# Altium PCB AdapterBoard.PcbDoc
Units mm, origin at the board's own origin, x right, y up, seen from the top; angles counter-clockwise.
Board outline 89.3 x 93 mm, 2 copper layers (Top Layer, Bottom Layer); 3 components, 104 nets, 204 pads, 94 vias.
Unrouted connection lines stored in the file: 8.
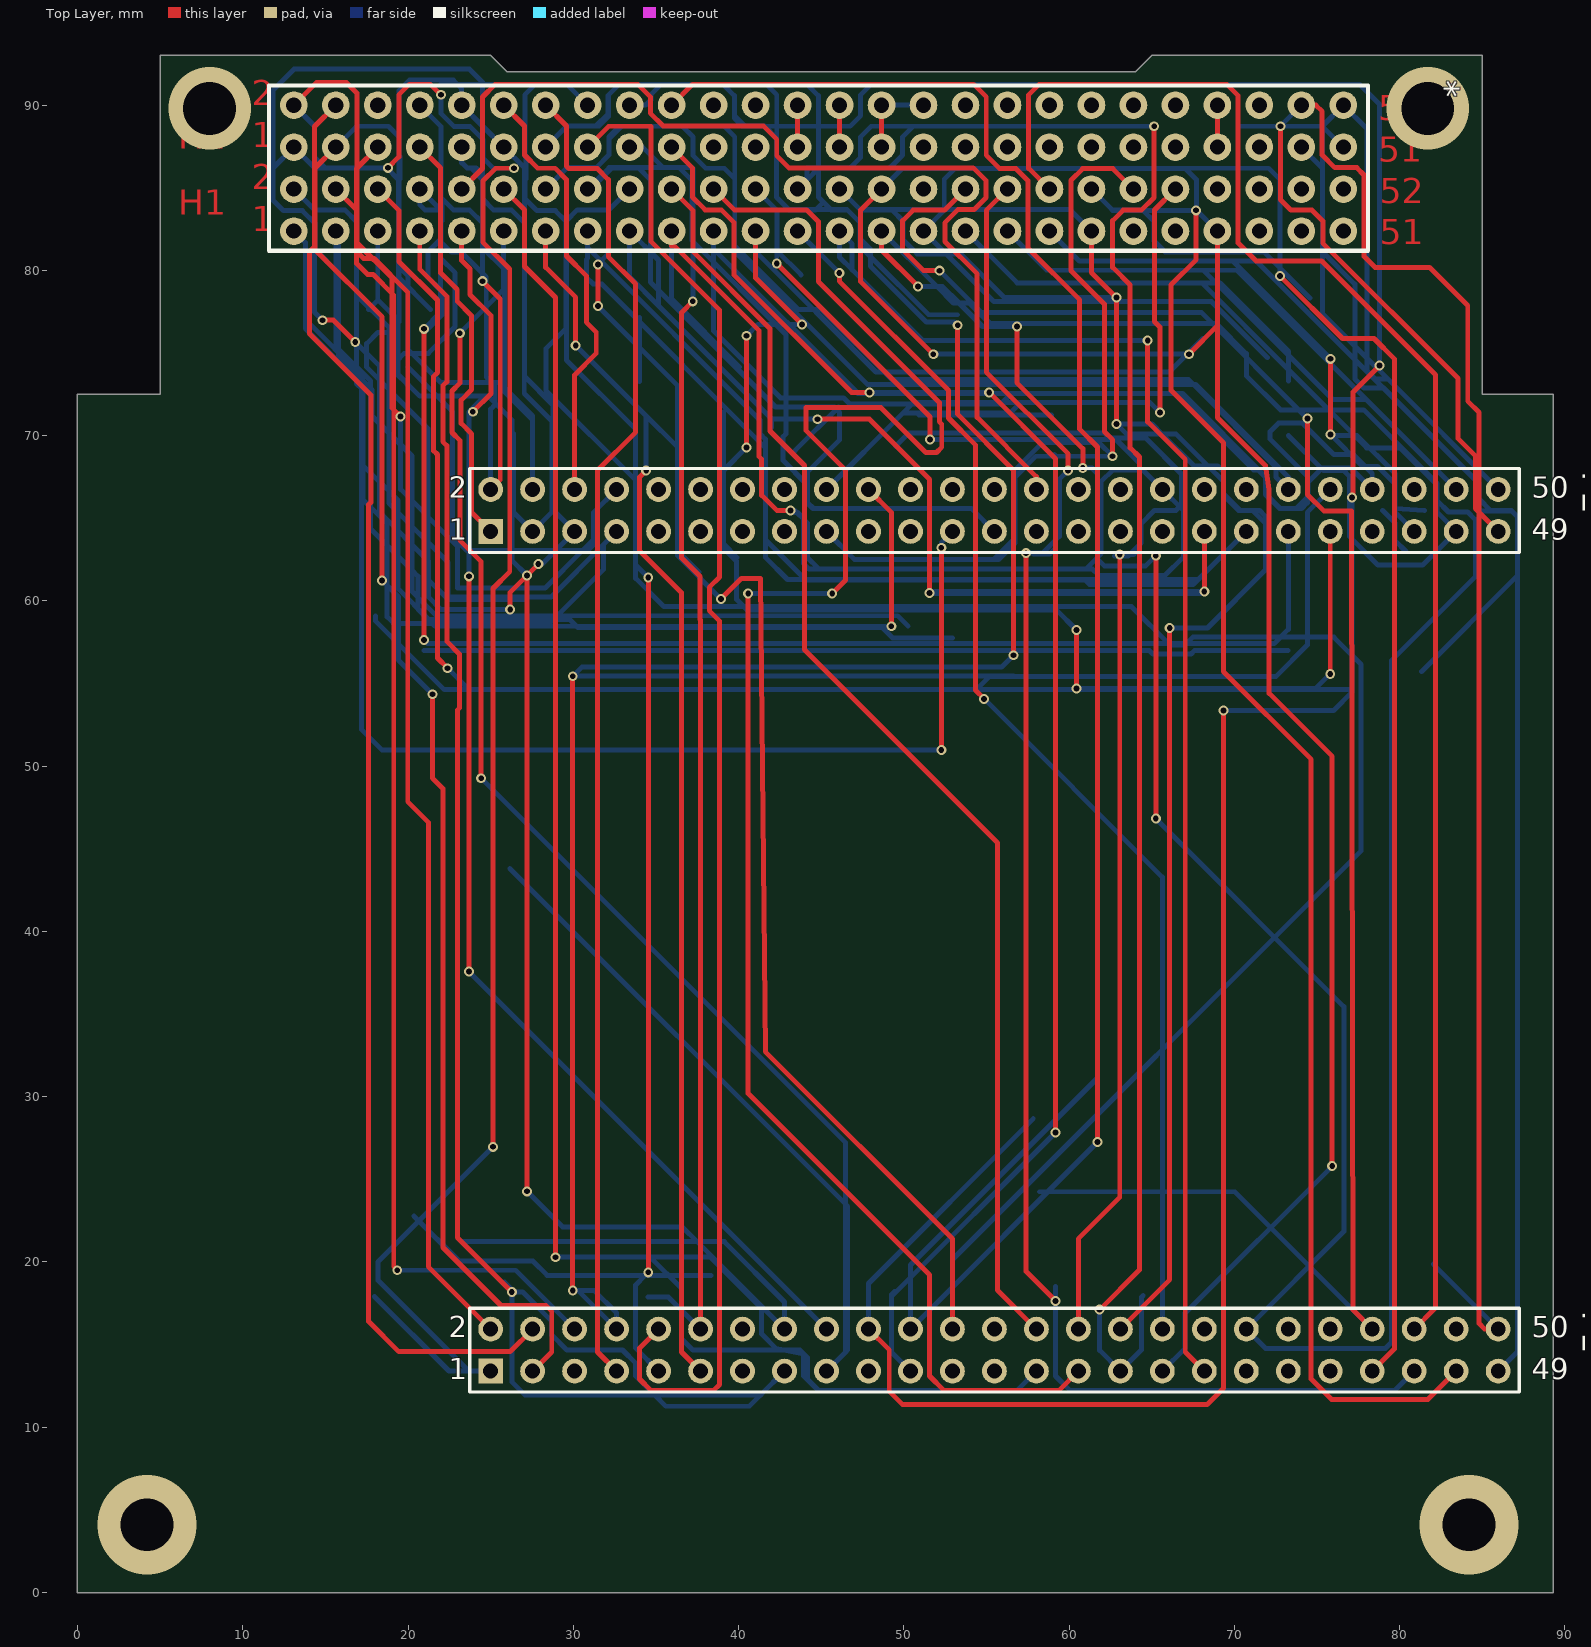
[diagram p0: Top Layer view]
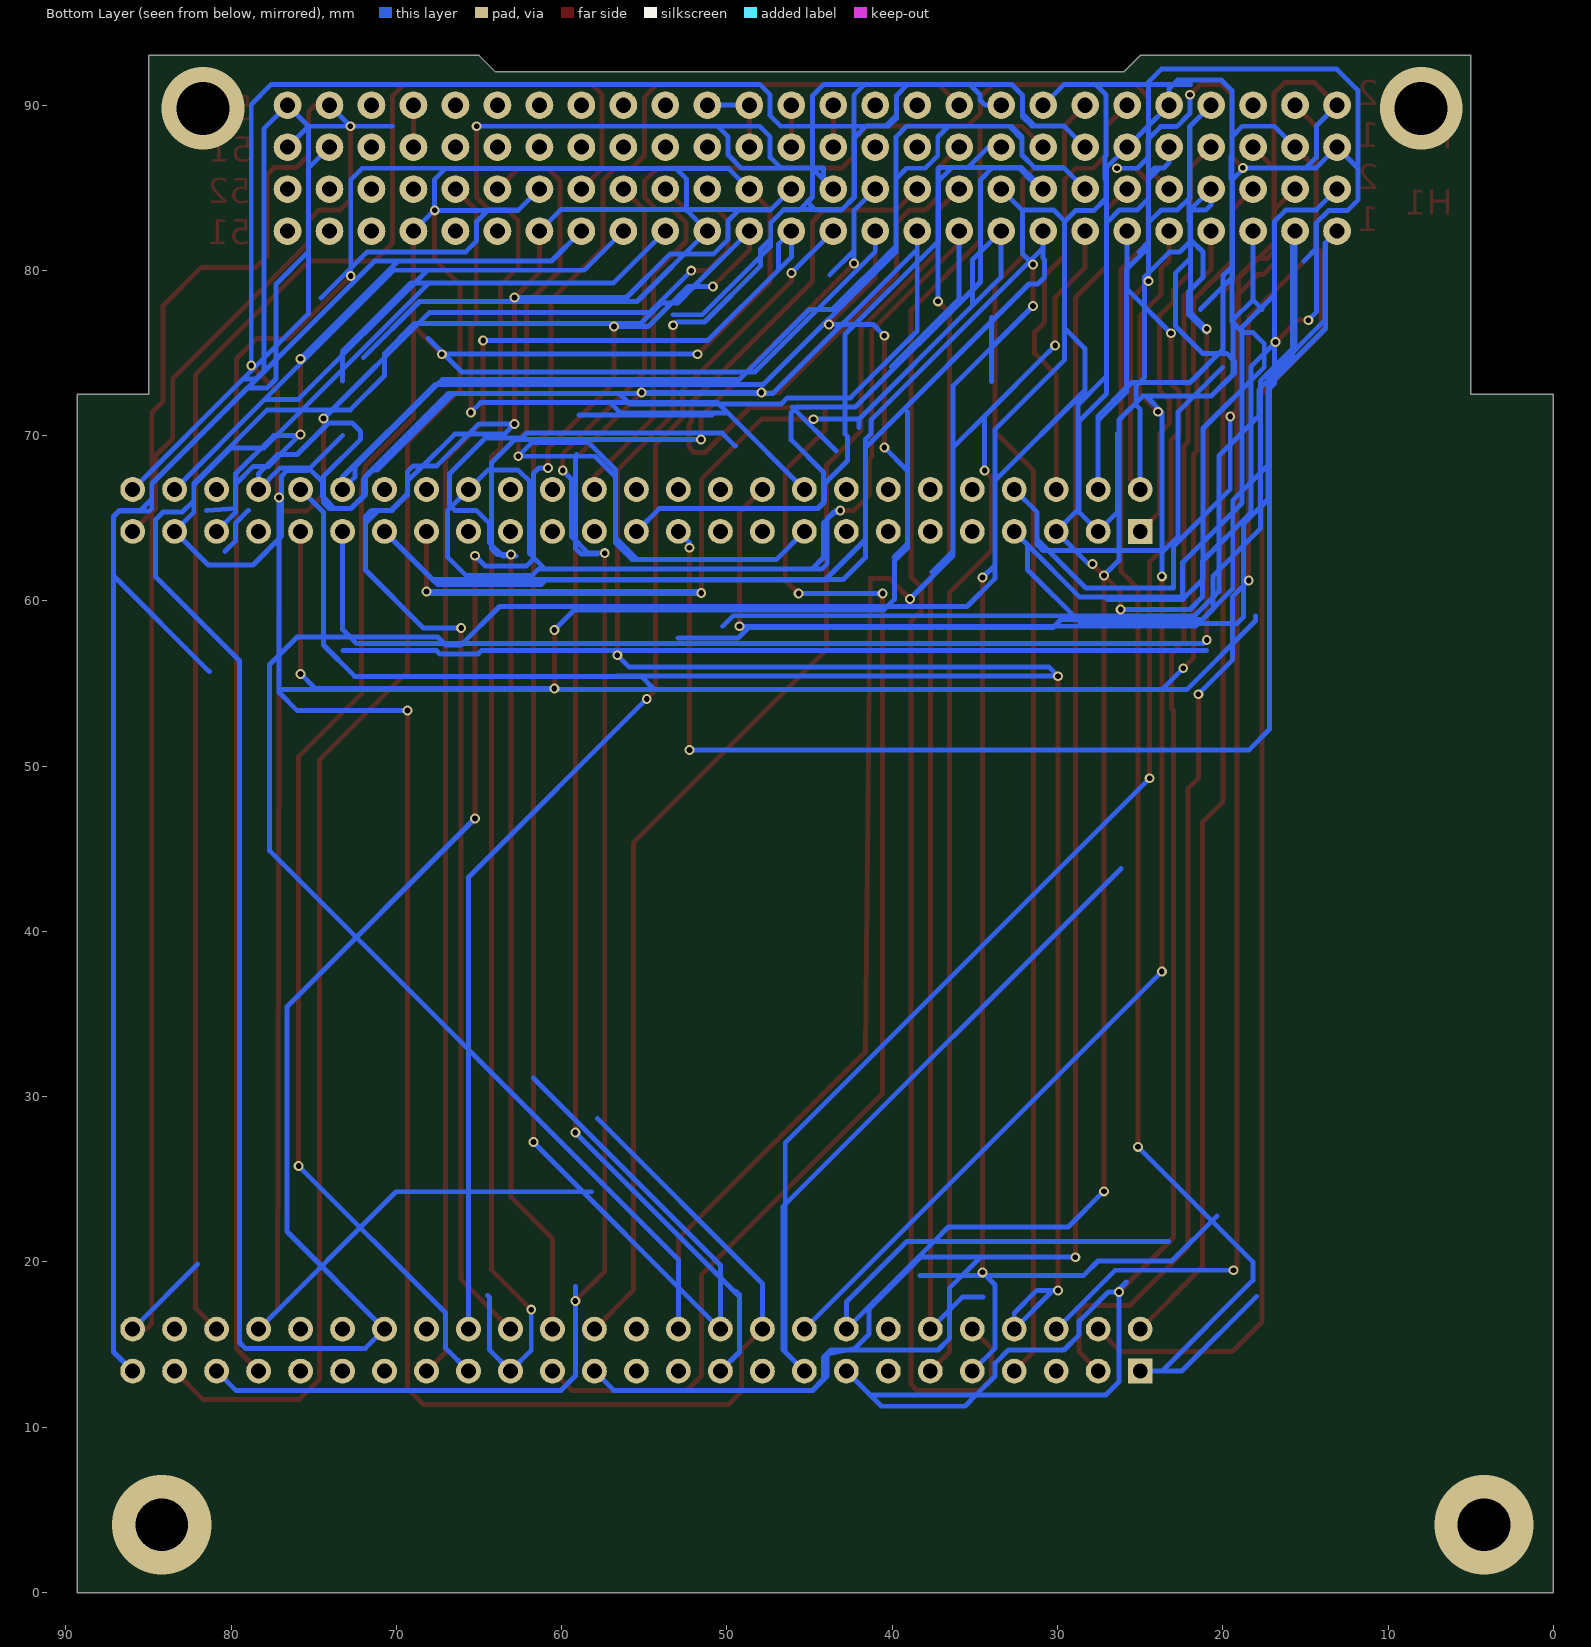
[diagram p1: Bottom Layer view, seen from below]

## Layer stack, top to bottom
Top Solder: solder mask 0.0102, Solder Resist, Dk 3.5
Top Layer: signal copper 0.0356
Dielectric 1: dielectric 0.32, FR-4, Dk 4.8
Bottom Layer: signal copper 0.0356
Bottom Solder: solder mask 0.0102, Solder Resist, Dk 3.5

## Board outline
0,0 0,72.5 5,72.5 5,93 25,93 26,92 64,92 65,93 85,93 85,72.5 89.3,72.5 89.3,0

## Design rules (kind name [scope] priority, off if disabled: settings)
Clearance [All] p1: gap=0.254
PolygonConnect [All] p1: connectstyle=Relief reliefconductorwidth=0.254 reliefentries=4 polygonreliefangle="90 Angle" airgapwidth=0.254
RoomDefinition AdapterBoard [InComponentClass('AdapterBoard')] p1: confinementstyle=ConfineIn formatcopy=TRUE lockcomponents=FALSE outline 90.6,-1.2 130.6,-1.2 130.6,69.8 90.6,69.8
RoutingVias [All] p1: holewidth=0.35 width=0.6 viastyle="Through Hole" minholewidth=0.35 minwidth=0.6 maxholewidth=0.35 maxwidth=0.6
SolderMaskExpansion [All] p1: expansion=0.102
Width [All] p1: maxlimit=0.3 minlimit=0.3 preferedwidth=0.3 minimp=50.000000 maximp=50.000000 favimp=50.000000
30 further rules are at their usual default settings.

## Components (designator, comment, footprint, x,y, rotation, side; value= is the part's Value field where it differs from the comment)
* "PC-104" PC-104FOOTPRINT 13.09,82.37 r0 top
P1 "Header 25X2" HDR2X25 25,13.4 r0 top
P2 "Header 25X2" HDR2X25 25,64.2 r0 top

## Footprints (in the part's own frame and the unit in brackets; to place one, negate y for a bottom-side part, rotate by r counter-clockwise, add the part's x,y. Pads: shape width x height; smd on the part's side, far side on the other; paste and mask are expansions set on the pad)
HDR2X25 [mm] "Connector; Header; 25x2 Position"
  rect 1.5x1.5 hole 0.9: 1(0,0)
  round 1.5 hole 0.9: 2(0,2.54) 3(2.54,0) 4(2.54,2.54) 5(5.08,0) 6(5.08,2.54) 7(7.62,0) 8(7.62,2.54) 9(10.16,0) 10(10.16,2.54) 11(12.7,0) 12(12.7,2.54) 13(15.24,0) 14(15.24,2.54) 15(17.78,0) 16(17.78,2.54) 17(20.32,0) 18(20.32,2.54) 19(22.86,0) 20(22.86,2.54) 21(25.4,0) 22(25.4,2.54) 23(27.94,0) 24(27.94,2.54) 25(30.48,0) 26(30.48,2.54) 27(33.02,0) 28(33.02,2.54) 29(35.56,0) 30(35.56,2.54) 31(38.1,0) 32(38.1,2.54) 33(40.64,0) 34(40.64,2.54) 35(43.18,0) 36(43.18,2.54) 37(45.72,0) 38(45.72,2.54) 39(48.26,0) 40(48.26,2.54) 41(50.8,0) 42(50.8,2.54) 43(53.34,0) 44(53.34,2.54) 45(55.88,0) 46(55.88,2.54) 47(58.42,0) 48(58.42,2.54) 49(60.96,0) 50(60.96,2.54)
  silkscreen extent -1.27,-1.27 62.23,3.81
PC-104FOOTPRINT [mm]
  round 1.676 hole 0.914 mask+0.076: H1_1(0,0) H1_2(0,2.54) H1_3(2.54,0) H1_4(2.54,2.54) H1_5(5.08,0) H1_6(5.08,2.54) H1_7(7.62,0) H1_8(7.62,2.54) H1_9(10.16,0) H1_10(10.16,2.54) H1_11(12.7,0) H1_12(12.7,2.54) H1_13(15.24,0) H1_14(15.24,2.54) H1_15(17.78,0) H1_16(17.78,2.54) H1_17(20.32,0) H1_18(20.32,2.54) H1_19(22.86,0) H1_20(22.86,2.54) H1_21(25.4,0) H1_22(25.4,2.54) H1_23(27.94,0) H1_24(27.94,2.54) H1_25(30.48,0) H1_26(30.48,2.54) H1_27(33.02,0) H1_28(33.02,2.54) H1_29(35.56,0) H1_30(35.56,2.54) H1_31(38.1,0) H1_32(38.1,2.54) H1_33(40.64,0) H1_34(40.64,2.54) H1_35(43.18,0) H1_36(43.18,2.54) H1_37(45.72,0) H1_38(45.72,2.54) H1_39(48.26,0) H1_40(48.26,2.54) H1_41(50.8,0) H1_42(50.8,2.54) H1_43(53.34,0) H1_44(53.34,2.54) H1_45(55.88,0) H1_46(55.88,2.54) H1_47(58.42,0) H1_48(58.42,2.54) H1_49(60.96,0) H1_50(60.96,2.54) H1_51(63.5,0) H1_52(63.5,2.54) H2_1(0,5.08) H2_2(0,7.62) H2_3(2.54,5.08) H2_4(2.54,7.62) H2_5(5.08,5.08) H2_6(5.08,7.62) H2_7(7.62,5.08) H2_8(7.62,7.62) H2_9(10.16,5.08) H2_10(10.16,7.62) H2_11(12.7,5.08) H2_12(12.7,7.62) H2_13(15.24,5.08) H2_14(15.24,7.62) H2_15(17.78,5.08) H2_16(17.78,7.62) H2_17(20.32,5.08) H2_18(20.32,7.62) H2_19(22.86,5.08) H2_20(22.86,7.62) H2_21(25.4,5.08) H2_22(25.4,7.62) H2_23(27.94,5.08) H2_24(27.94,7.62) H2_25(30.48,5.08) H2_26(30.48,7.62) H2_27(33.02,5.08) H2_28(33.02,7.62) H2_29(35.56,5.08) H2_30(35.56,7.62) H2_31(38.1,5.08) H2_32(38.1,7.62) H2_33(40.64,5.08) H2_34(40.64,7.62) H2_35(43.18,5.08) H2_36(43.18,7.62) H2_37(45.72,5.08) H2_38(45.72,7.62) H2_39(48.26,5.08) H2_40(48.26,7.62) H2_41(50.8,5.08) H2_42(50.8,7.62) H2_43(53.34,5.08) H2_44(53.34,7.62) H2_45(55.88,5.08) H2_46(55.88,7.62) H2_47(58.42,5.08) H2_48(58.42,7.62) H2_49(60.96,5.08) H2_50(60.96,7.62) H2_51(63.5,5.08) H2_52(63.5,7.62)
  silkscreen extent -1.5,-1.19 65,8.81

## Part data
P1: "Header, 25-Pin, Dual row, ESQ-126-14-G-D"
P2: "Header, 25-Pin, Dual row,ESQ-126-14-G-D"

## Via types
v1: diameter 0.6, hole 0.35, Top Layer to Bottom Layer, 90 vias
v2: diameter 5, hole 3.2, Top Layer to Bottom Layer, 2 vias
v3: diameter 6, hole 3.2, Top Layer to Bottom Layer, 2 vias

## Nets (pads, with @x,y where several pads share a name; then routed paths per layer and width w, separated by ;. In a path a pad name is that pad's centre, name@x,y a point inside that pad or via, vN(x,y) a via of type N, cw(c..) or ccw(c..) an arc to the next point about the centre after c; other vN are vias at no path point)
"5 V_IN": *.H1_32
12C-SCL: *.H1_43
12C-SDA: *.H1_41
+3.3V: *.H2_27 *.H2_28 | length 2.5
  Top Layer w0.3: *.H2_27 *.H2_28
+5V: *.H2_25 *.H2_26 | length 2.5
  Top Layer w0.3: *.H2_25 *.H2_26
A0: *.H2_17 P1.12 | length 83.2
  Top Layer w0.3: v1(37.23,78.124) 36.544,77.438 36.544,62.605 37.674,61.475 37.674,58.874 37.7,58.848 P1.12
  Bottom Layer w0.3: *.H2_17 34.193,87.45 35.435,86.208 37.172,86.208 37.23,86.15 v1(37.23,78.124) ; 34.004,73.273 34.004,77.159 ; 34.512,17.875 35.765,17.875 P1.12
A1: *.H1_13 P1.11 | length 84
  Top Layer w0.3: *.H1_13 28.33,80.181 30.143,78.368 v1(30.143,75.457) ; v1(34.411,67.888) 34.006,67.483 34.006,63.036 36.544,60.498 36.544,14.556 P1.11
  Bottom Layer w0.3: v1(30.143,75.457) 30.499,75.101 34.411,71.19 ; v1(34.411,67.888) 34.411,71.19 ; 37.611,61.741 36.316,63.036 36.316,69.285 34.411,71.19
A2: P1.14
A3: P1.13
A4: *.H1_5 P1.16 | length 106.7
  Top Layer w0.3: v1(27.197,24.276) v1(27.197,61.538)
  Bottom Layer w0.3: 17.621,77.641 18.17,78.19 18.17,78.227 ; *.H1_5 18.17,78.227 ; 23.285,21.228 37.492,21.228 ; v1(27.197,24.276) 29.356,22.117 36.603,22.117 37.492,21.228 ; v1(27.197,61.538) 26.283,62.452 26.283,70.948 24.847,72.384 20.72,72.384 19.391,73.713 19.391,77.006 18.17,78.227 ; 37.492,21.228 P1.16 42.78,17.583 39.135,21.228 37.492,21.228
A5: *.H1_7 P1.15 | length 109.6
  Top Layer w0.3: *.H1_7 20.71,80.06 22.346,78.425 22.346,73.256 22.108,73.019 22.108,69.632 22.346,69.394 22.346,57.55 23.108,56.788 23.108,53.511 22.981,53.384 22.981,21.482 v1(26.283,18.18)
  Bottom Layer w0.3: 25.825,18.79 26.283,18.332 v1(26.283,18.18) ; P1.15 41.345,11.965 ; v1(26.283,18.18) 26.283,12.752 27.07,11.965 34.909,11.965 ; v1(26.283,18.18) 26.932,18.18 28.694,16.418 28.694,15.591 29.61,14.675 32.977,14.675 33.774,13.878 33.774,13.1 34.909,11.965 ; 34.909,11.965 41.345,11.965 ; 34.909,11.965 35.603,11.271 40.651,11.271 41.345,11.965
A6: *.H1_9 P1.18 | length 78.1
  Top Layer w0.3: *.H1_9 23.25,80.593 23.75,80.093 23.75,78.53 25.026,77.254 25.026,72.549 v1(23.92,71.444) ; v1(23.692,37.568) v1(23.692,61.487)
  Bottom Layer w0.3: v1(23.692,37.568) P1.18 ; v1(23.692,61.487) 23.692,64.027 23.692,71.215 ; v1(23.92,71.444) 23.692,71.215 ; 24.555,72.307 23.692,71.444 23.692,71.215
A7: *.H1_11 P1.17 | length 118.4
  Top Layer w0.3: v1(23.133,76.194) 23.133,73.173 22.662,72.702 22.662,70.186 23.133,69.715 23.133,63.671 24.428,62.376 v1(24.428,49.27)
  Bottom Layer w0.3: v1(23.133,76.194) 25.79,78.851 *.H1_11 ; v1(24.428,49.27) 46.476,27.222 46.476,23.489 ; 26.156,43.809 46.476,23.489 ; P1.17 46.476,14.556 ; 46.476,14.556 46.476,23.489 ; 46.476,14.556 46.603,14.683 46.603,23.362 46.476,23.489
A8: P2.43
A9: *.H1_21 P2.44 | length 99.7
  Bottom Layer w0.3: *.H1_21 38.49,81.28 ; 38.49,81.28 38.49,76.331 42.54,72.28 46.348,72.28 46.72,71.908 55.874,71.908 56.514,72.548 ; 38.49,81.28 47.221,72.548 56.514,72.548 ; 56.514,72.548 66.529,72.548 ; 66.529,72.548 66.866,72.548 71.876,67.538 71.876,67.481 ; 66.529,72.548 71.164,67.913 71.444,67.913 71.876,67.481 ; 71.876,67.481 72.003,67.354 72.003,66.364 72.79,65.576 ; 71.876,67.481 71.876,66.44 72.739,65.576 72.79,65.576 ; 72.79,65.576 73.73,65.576 ; 73.73,65.576 74.414,66.261 ; 73.73,65.576 74.06,65.576 74.414,65.93 74.414,66.261 ; 74.414,66.261 74.414,67.534 72.161,69.787 72.161,70.25 72.676,70.765 74.111,70.765 76.016,68.86 77.19,68.86 78.34,67.71 P2.44 77.028,68.052 75.33,68.052 74.467,67.189 74.467,66.314 74.414,66.261
A10: *.H1_23 P2.41 | length 108.7
  Top Layer w0.3: v1(40.481,69.285) v1(40.481,76.041) ; *.H1_23 41.03,79.531 v1(43.834,76.727) ; v1(60.446,54.705) v1(60.446,58.236) ; v1(75.8,55.582) P2.41
  Bottom Layer w0.3: v1(40.481,69.285) 39.084,67.888 39.084,63.189 39.872,62.401 39.872,60.09 40.507,59.455 59.226,59.455 v1(60.446,58.236) ; v1(40.481,76.041) 41.167,76.727 v1(43.834,76.727) ; *.H1_23 41.03,81.131 48.312,73.85 66.052,73.85 68.091,75.889 ; v1(60.446,54.705) 74.924,54.705 v1(75.8,55.582)
A13: *.H1_6 P2.42 | length 124.8
  Top Layer w0.3: *.H1_6 19.45,83.63 19.45,80.537 21.78,78.207 21.78,73.81 21.554,73.585 21.554,69.078 21.78,68.852 21.78,56.541 v1(22.396,55.924)
  Bottom Layer w0.3: 18.028,59.099 18.028,58.795 22.193,54.629 23.692,54.629 ; v1(22.396,55.924) 23.692,54.629 ; P2.42 74.416,65.356 74.416,57.326 72.524,55.435 55.195,55.435 54.389,54.629 ; 76.956,54.629 54.389,54.629 ; 23.692,54.629 54.389,54.629
A14: *.H1_8 P2.39 | length 148.4
  Top Layer w0.3: v1(20.974,57.626) v1(20.974,76.461)
  Bottom Layer w0.3: 20.974,56.991 64.86,56.991 65.064,56.787 67.376,56.787 67.58,56.991 73.247,56.991 ; v1(20.974,57.626) 21.184,57.416 72.402,57.416 73.26,58.274 P2.39 ; v1@20.974,76.232 22.066,77.324 22.066,78.708 21.965,78.81 ; v1(20.974,76.461) 21.965,77.452 21.965,78.81 ; 21.965,78.81 21.203,79.572 21.203,81.106 21.965,81.868 ; 21.965,78.81 21.965,81.868 ; 21.965,81.868 21.965,83.636 ; 21.965,83.636 21.965,83.655 *.H1_8 20.71,83.963 21.037,83.636 21.965,83.636
A15: *.H1_14 P2.40 | length 109.8
  Bottom Layer w0.3: *.H1_14 29.621,86.201 ; 29.621,86.201 29.628,86.208 31.384,86.208 32.15,86.974 ; 29.621,86.201 31.388,86.201 32.15,86.963 32.15,86.974 ; 32.15,86.974 32.15,87.947 ; 32.15,87.947 32.15,88.081 32.785,88.716 32.919,88.716 ; 32.15,87.947 32.919,88.716 ; 32.919,88.716 36.595,88.716 ; 36.595,88.716 39.135,88.716 39.77,88.081 39.77,85.541 ; 36.595,88.716 37.248,88.063 37.248,86.936 38.008,86.176 39.135,86.176 39.77,85.541 ; 39.77,81.477 39.77,85.541 ; 39.77,81.477 39.77,81.121 47.789,73.102 67.511,73.102 ; 39.77,81.477 43.614,77.633 45.017,77.633 49.262,73.388 67.225,73.388 67.511,73.102 ; 67.511,73.102 72.519,68.094 72.519,67.481 P2.40 73.26,67.491 67.649,73.102 67.511,73.102
AGND: *.H2_31
B0: *.H2_20 P1.22 | length 122.4
  Top Layer w0.3: *.H2_20 37.216,91.256 54.221,91.256 54.985,90.492 54.985,86.961 55.794,86.152 56.784,86.152 57.512,85.425 57.512,81.337 60.638,78.211 60.638,70.387 61.716,69.31 v1(61.716,27.256)
  Bottom Layer w0.3: v1(61.716,27.256) P1.22 50.4,19.814 61.716,31.13
B1: *.H2_19 P1.21 | length 94.1
  Top Layer w0.3: *.H2_19 37.205,86.195 37.205,84.439 37.982,83.661 38.955,83.661 39.732,82.885 39.732,79.711 46.831,72.612 v1(47.923,72.612) ; v1(55.162,72.612) 59.176,68.599 v1(59.176,27.832)
  Bottom Layer w0.3: v1(47.923,72.612) v1(55.162,72.612) ; 49.447,18.231 49.244,18.028 49.244,17.901 ; P1.21 49.244,14.556 49.244,17.901 ; v1(59.176,27.832) 49.244,17.901
B2: *.H1_18 P1.24 | length 204.8
  Top Layer w0.3: v1(31.49,77.845) v1(31.49,80.359) ; v1(38.932,60.115) 40.176,61.36 41.332,61.36 41.624,32.722 52.94,21.406 P1.24
  Bottom Layer w0.3: v1(31.49,77.845) 36.316,73.019 36.316,62.732 v1(38.932,60.115) ; v1(31.49,80.359) 32.125,80.994 32.125,83.625 32.161,83.661 ; *.H1_18 32.161,83.661 ; P1.24 52.94,20.149 77.667,44.875 77.667,56.153 76.016,57.804 67.489,57.804 67.026,57.341 66.081,57.341 63.764,59.658 35.477,59.658 33.776,61.36 33.776,70.377 29.585,74.568 29.585,83.001 30.245,83.661 32.161,83.661
B3: *.H1_10 P2.28 | length 63
  Top Layer w0.3: *.H1_10 24.505,86.165 24.505,90.483 25.27,91.248 33.91,91.248 34.665,90.494 34.665,89.503 35.427,88.741 41.497,88.741 42.31,87.928 42.31,86.938 43.047,86.201 54.2,86.201 54.981,85.42 54.981,84.404 54.244,83.668 53.271,83.668 52.481,82.878 52.481,81.745 54.438,79.788 54.438,71.102 58.02,67.519 P2.28
B4: *.H1_16 P2.25 | length 82.8
  Bottom Layer w0.3: *.H1_16 *.H1_16@31.424,85.464 ; P2.25 54.104,65.576 ; *.H1_16@31.424,85.464 32.168,86.208 36.409,86.208 37.192,85.425 37.192,81.794 42.869,76.117 42.869,71.726 ; *.H1_16@31.424,85.464 31.61,85.464 32.321,86.176 33.979,86.176 34.665,85.49 34.665,79.293 42.231,71.726 42.869,71.726 ; 42.869,71.726 42.869,70.103 42.698,69.932 42.698,68.49 44.113,67.075 44.113,66.005 44.164,65.954 ; 42.869,71.726 45.794,71.726 46.12,71.4 46.12,69.742 44.164,67.786 44.164,65.954 ; 44.164,65.954 44.164,65.907 44.494,65.576 54.104,65.576 ; 44.164,65.954 44.532,65.586 54.094,65.586 54.104,65.576
B5: P2.26
B6: *.H1_1 P2.23 | length 139
  Top Layer w0.3: v1(52.267,50.971) v1(52.267,63.214)
  Bottom Layer w0.3: *.H1_1 13.786,81.674 ; v1(52.267,50.971) 18.434,50.971 17.174,52.231 17.174,73.089 13.786,76.477 13.786,81.674 ; v1(52.267,63.214) 52.267,63.527 P2.23 ; 52.953,57.753 49.32,57.753 48.685,58.388 30.27,58.388 29.788,58.871 21.253,58.871 19.399,60.725 19.399,66.084 17.24,68.243 17.24,73.577 13.811,77.006 13.811,81.649 13.786,81.674
B7: P2.24
B8: P2.19
B9: *.H1_3 P2.20 | length 116.8
  Top Layer w0.3: P2.20 49.244,65.356 v1(49.244,58.464)
  Bottom Layer w0.3: *.H1_3 *.H1_3@15.63,81.673 ; v1(49.244,58.464) 21.634,58.464 20.6,59.499 20.6,60.21 ; 50.26,58.464 49.625,59.099 21.71,59.099 20.6,60.21 ; *.H1_3@15.63,81.673 15.63,75.416 15.785,75.261 ; *.H1_3@15.63,81.673 15.785,81.518 15.785,75.261 ; 15.785,75.261 17.728,73.318 17.728,72.858 ; 15.785,75.261 15.785,74.801 17.728,72.858 ; 17.728,72.858 17.817,72.769 17.817,71.183 20.237,68.762 20.237,61.858 ; 17.728,72.858 17.728,64.367 20.237,61.858 ; 20.237,61.858 20.237,60.572 20.6,60.21 ; 20.237,61.858 20.6,61.496 20.6,60.21
B10: *.H1_25 P1.34 | length 75.6
  Top Layer w0.3: v1(46.095,79.845) 46.095,79.343 52.699,72.739 52.699,71.067 54.324,69.441 54.324,54.604 v1(54.858,54.07)
  Bottom Layer w0.3: *.H1_25 v1(46.095,79.845) ; v1(54.858,54.07) 65.64,43.288 P1.34
B11: *.H1_27 P1.35 | length 88.7
  Top Layer w0.3: v1(64.753,75.762) 64.753,70.831 67.026,68.558 67.026,14.554 P1.35
  Bottom Layer w0.3: v1(64.753,75.762) 51.145,75.762 46.875,80.032 ; 46.875,80.032 46.11,80.797 *.H1_27 46.875,81.605 46.875,80.032
B12: P1.36
B13: P1.37
B14: *.H1_29 P1.38 | length 191.4
  Top Layer w0.3: *.H1_29 48.65,81.233 v1(50.856,79.027) ; v1(56.839,76.6) 56.839,73.196 60.827,69.209 v1(60.827,68.04) ; v1(65.246,46.831) v1(65.246,62.732)
  Bottom Layer w0.3: *.H1_29 51.993,79.027 ; v1(50.856,79.027) 51.993,79.027 ; v1(56.839,76.6) 54.76,76.6 53.338,78.022 ; v1(60.827,68.04) 61.385,68.04 61.716,67.71 61.716,62.528 62.147,62.097 64.611,62.097 v1(65.246,62.732) ; v1(65.246,46.831) 76.625,35.452 76.625,21.845 P1.38 71.884,14.776 79.14,14.776 79.496,15.132 79.496,56.382 84.576,61.462 84.576,64.916 84.118,65.373 82.95,65.373 82.264,66.059 82.264,67.112 77.823,71.554 72.79,71.554 70.724,73.619 70.724,74.957 68.904,76.778 55.213,76.778 53.969,78.022 53.338,78.022 ; 51.993,79.027 52.998,78.022 53.338,78.022 ; 51.993,79.027 52.333,79.027 53.338,78.022
B15: P1.39
C0: *.H2_13 P1.8 | length 179.9
  Top Layer w0.3: v1(29.966,18.282) v1(29.966,55.442) ; v1(53.257,76.676) 53.257,71.291 56.636,67.913 v1(56.636,56.712)
  Bottom Layer w0.3: *.H2_13 29.621,88.741 31.378,88.741 ; v1(29.966,18.282) 30.278,18.282 ; v1(53.257,76.676) 53.064,76.869 51.363,76.869 47.986,80.247 47.986,80.83 ; 53.257,77.311 51.505,77.311 47.986,80.83 ; 56.636,55.442 v1(29.966,55.442) 30.512,55.989 55.912,55.989 v1(56.636,56.712) ; 30.278,18.282 31.248,18.282 32.62,16.91 P1.8 30.278,18.282 ; 31.378,88.741 31.566,88.741 32.125,89.3 32.125,90.595 ; 31.378,88.741 32.112,89.476 32.112,90.583 32.125,90.595 ; 32.125,90.595 32.785,91.256 41.675,91.256 ; 41.675,91.256 44.139,91.256 44.825,90.57 44.825,84.439 45.595,83.668 ; 41.675,91.256 42.31,90.621 42.31,84.413 43.055,83.668 45.595,83.668 ; 45.595,83.668 46.569,83.668 46.575,83.661 ; 45.595,83.668 45.602,83.661 46.575,83.661 ; 46.575,83.661 47.352,82.885 47.352,81.896 ; 47.352,81.896 47.352,81.464 47.986,80.83 ; 47.352,81.896 47.986,81.262 47.986,80.83
C1: *.H2_14 P1.7 | length 81.3
  Top Layer w0.3: *.H2_14 29.585,88.735 29.585,86.303 29.735,86.152 31.463,86.152 32.125,85.49 32.125,80.826 33.776,79.175 33.776,70.204 31.466,67.894 31.466,14.554 P1.7
C2: *.H2_15 P1.10 | length 91.5
  Top Layer w0.3: *.H2_15 32.136,88.716 34.665,88.716 34.69,88.69 34.69,81.756 38.856,77.591 38.856,61.447 38.228,60.819 38.228,59.402 38.856,58.774 38.856,12.592 38.5,12.236 34.69,12.236 34.006,12.92 34.006,14.786 P1.10
C3: *.H2_16 P1.9 | length 123.3
  Top Layer w0.3: v1(34.538,19.374) v1(34.538,61.411)
  Bottom Layer w0.3: 19.949,73.104 19.305,73.748 19.305,74.512 19.767,74.974 21.228,74.974 22.854,76.6 22.854,79.851 21.965,80.74 ; 20.364,22.777 23.082,20.06 27.553,20.06 28.416,19.196 v1@34.36,19.196 ; 21.965,91.256 27.705,91.256 ; *.H2_16 29.604,91.256 27.705,91.256 ; v1(34.538,19.374) v1@34.36,19.196 ; v1(34.538,61.411) 33.776,62.173 33.776,67.288 28.34,72.724 28.34,75.264 29.572,76.496 29.572,82.95 28.91,83.612 27.802,83.612 27.07,84.344 27.07,85.476 27.129,85.535 27.129,86.884 27.07,86.943 27.07,90.621 27.705,91.256 ; P1.9 33.776,14.784 33.776,18.612 v1@34.36,19.196 ; 38.322,19.196 v1@34.36,19.196
C4: *.H2_18 P1.20 | length 202.8
  Top Layer w0.3: P1.20 49.117,14.683 49.117,12.186 49.93,11.373 68.345,11.373 69.336,12.363 v1(69.336,53.359) ; v1(77.108,66.262) 77.184,66.338 77.184,72.638 v1(78.784,74.238)
  Bottom Layer w0.3: *.H2_18 34.372,89.99 34.69,90.308 34.69,90.621 35.325,91.256 39.059,91.256 39.745,90.57 39.745,89.376 ; 44.952,83.941 44.647,83.636 43.088,83.636 42.285,84.439 42.285,88.03 41.599,88.716 ; P1.20 47.86,18.701 57.829,28.67 ; 50.921,71.241 58.947,71.241 ; 57.829,62.833 58.82,62.833 59.176,63.189 59.176,68.777 59.099,68.853 ; v1(69.336,53.359) 75.991,53.359 77.108,54.476 v1(77.108,66.262) ; v1(78.784,74.238) 78.784,90.037 77.565,91.256 48.025,91.256 47.39,90.621 47.39,89.351 46.755,88.716 41.599,88.716 ; 39.745,89.376 39.745,89.209 40.212,88.741 40.38,88.741 ; 39.745,89.376 40.38,88.741 ; 40.38,88.741 40.405,88.716 41.599,88.716 ; 40.38,88.741 41.573,88.741 41.599,88.716
C5: P1.19
C6: *.H1_33 P2.47 | length 63.3
  Bottom Layer w0.3: *.H1_33 56.858,79.242 68.015,79.242 ; 73.273,69.996 75.375,67.894 76.6,67.894 76.954,67.54 76.954,63.9 78.681,62.173 81.393,62.173 P2.47 82.264,65.356 82.264,66.988 79.994,69.258 77.998,69.258 73.273,73.984 ; 73.273,73.298 73.273,73.984 ; 68.015,79.242 69.132,79.242 73.273,75.101 73.273,73.984 ; 68.015,79.242 73.273,73.984
C7: *.H1_35 P2.48 | length 46.7
  Bottom Layer w0.3: *.H1_35 58.636,80.004 68.124,80.004 ; P2.48 77.966,72.194 ; 68.124,80.004 70.156,80.004 77.966,72.194 ; 68.124,80.004 75.934,72.194 77.966,72.194
C8: *.H1_37 P2.45 | length 69.6
  Top Layer w0.3: v1(75.813,70.072) v1(75.813,74.644)
  Bottom Layer w0.3: *.H1_37 60.618,80.562 69.894,80.562 ; v1(75.813,70.072) 77.743,68.142 78.657,68.142 79.724,67.075 79.724,65.356 P2.45 ; v1(75.813,74.644) 69.894,80.562 ; 81.324,55.721 87.116,61.512 87.116,65.094 86.76,65.449 84.931,65.449 84.804,65.576 84.804,67.075 71.317,80.562 69.894,80.562
C9: P2.46
C10: *.H1_15 P2.37 | length 99.4
  Bottom Layer w0.3: *.H1_15 30.87,81.36 ; P2.37 67.817,61.297 ; 30.87,81.36 30.87,80.733 30.786,80.649 30.786,79.58 31.197,79.169 31.724,79.169 41.624,69.268 ; 30.87,81.36 41.297,70.932 41.297,70.109 41.624,69.782 41.624,69.268 ; 41.624,63.712 41.624,62.63 42.957,61.297 44.038,61.297 ; 41.624,63.712 44.038,61.297 ; 41.624,63.712 41.624,69.268 ; 44.038,61.297 67.817,61.297 ; 44.038,61.297 44.074,61.262 60.969,61.262 61.243,60.989 67.509,60.989 67.817,61.297
C11: P2.38
C12: *.H1_17 P2.35 | length 79.3
  Top Layer w0.3: v1(44.774,70.991) 47.919,70.991 51.556,67.354 v1(51.556,60.471) ; v1(68.18,60.573) P2.35
  Bottom Layer w0.3: 42.005,70.479 42.005,71.008 ; 43.402,69.082 46.044,71.723 ; v1(44.774,70.991) 42.022,70.991 42.005,71.008 ; v1(51.556,60.471) 51.592,60.435 68.042,60.435 v1(68.18,60.573) v1@51.556,60.573 ; 35.158,77.855 42.005,71.008 ; 35.158,77.855 33.41,79.603 *.H1_17 35.158,80.622 35.158,77.855
C14: P2.9
C15: P2.10
D0: P2.36
D1: P2.33
D2: *.H1_19 P2.34 | length 93
  Top Layer w0.3: *.H1_19 35.95,81.455 36.138,81.455 41.243,76.35 41.243,68.726 41.396,68.574 41.396,66.389 42.31,65.475 v1(43.148,65.475)
  Bottom Layer w0.3: *.H1_19 35.95,78.261 40.049,74.162 ; v1(43.148,65.475) 43.148,65.348 43.529,65.348 ; v1@43.402,65.475 43.529,65.348 ; 43.529,65.348 43.936,64.941 ; 43.529,65.348 43.58,65.348 43.936,64.992 43.936,64.941 ; 43.936,64.941 43.936,62.249 44.266,61.919 61.416,61.919 61.792,61.543 65.805,61.543 66.905,62.643 66.905,65.475 P2.34 64.467,67.913 62.63,67.913 61.944,67.227 61.944,62.852 61.03,61.938 44.85,61.938 44.164,62.624 44.164,64.713 43.936,64.941
D8: P1.40
D9: P1.41
D10: P1.42
D11: *.H1_31 P1.43 | length 125.1
  Top Layer w0.3: v1(72.765,79.648) 76.541,75.872 78.446,75.872 79.673,74.644 79.673,14.733 P1.43
  Bottom Layer w0.3: 72.003,74.716 68.604,78.114 55.446,78.114 *.H1_31 52.445,83.625 52.445,85.515 53.105,86.176 72.079,86.176 72.765,85.49 v1(72.765,79.648)
D12: *.H1_34 P1.44 | length 116.3
  Top Layer w0.3: v1(52.165,79.978) 51.2,79.978 49.93,81.248 49.93,83.001 50.565,83.636 52.456,83.636 *.H1_34 ; v1(74.416,71.037) 74.416,66.44 75.432,65.424 77.083,65.424 77.184,17.096 P1.44
  Bottom Layer w0.3: v1(52.165,79.978) 54.705,77.438 68.015,77.438 v1(74.416,71.037) ; 58.21,24.251 70.029,24.251 P1.44
D13: *.H1_36 P1.45 | length 100.2
  Top Layer w0.3: *.H1_36 54.992,83.632 54.992,73.837 59.938,68.891 v1(59.938,67.888) ; v1(57.398,62.884) 57.398,19.425 v1(59.176,17.647)
  Bottom Layer w0.3: v1(57.398,62.884) 58.388,62.884 59.404,63.9 59.404,67.354 v1(59.938,67.888) ; 59.176,18.51 v1(59.176,17.647) 59.176,13.1 60.039,12.236 79.716,12.236 P1.45
D14: *.H1_38 P1.46 | length 105
  Top Layer w0.3: *.H1_38 57.55,86.17 57.55,90.621 58.185,91.256 69.539,91.256 70.225,90.57 70.225,81.655 71.305,80.574 75.268,80.574 82.163,73.679 82.163,17.223 P1.46
  Bottom Layer w0.3: 78.962,65.475 79.724,64.713 79.724,63.646 80.385,62.986
D15: *.H1_40 P1.47 | length 106.6
  Top Layer w0.3: v1(67.685,83.63) 67.685,80.639 66.168,79.122 66.168,72.734 69.336,69.567 69.336,55.721 74.644,50.413 74.644,12.922 75.874,11.692 81.712,11.692 P1.47
  Bottom Layer w0.3: *.H1_40 62.599,83.661 ; v1(67.685,83.63) 64.465,83.63 ; 74.577,78.318 71.774,81.121 65.805,81.121 65.145,81.782 65.145,82.95 64.465,83.63 ; 62.599,83.661 62.63,83.63 64.465,83.63 ; 62.599,83.661 64.433,83.661 64.465,83.63
E0: *.H1_42 P2.17 | length 54.5
  Top Layer w0.3: v1(62.63,68.751) 62.63,69.746 62.129,70.247 62.129,77.964 60.101,79.993 60.101,85.434 60.819,86.152 62.648,86.152 *.H1_42
  Bottom Layer w0.3: P2.17 47.028,62.492 55.413,62.492 ; 55.413,62.492 55.736,62.492 56.737,63.494 56.737,63.816 ; 55.413,62.492 56.737,63.816 ; 56.737,63.816 56.737,67.499 ; 56.737,67.499 56.737,67.939 58.372,69.573 61.808,69.573 v1(62.63,68.751) 57.989,68.751 56.737,67.499
E1: *.H1_44 P2.18 | length 44.2
  Top Layer w0.3: v1(65.499,71.403) 65.499,76.561 65.17,76.89 65.17,83.65 *.H1_44
  Bottom Layer w0.3: P2.18 49.934,71.354 ; v1(65.499,71.403) 64.907,71.994 57.061,71.994 ; 49.934,71.354 50.574,71.994 57.061,71.994 ; 49.934,71.354 56.42,71.354 57.061,71.994
E2: P2.15
E3: P2.16
E4: P2.13
E5: P2.14
E6: P2.11
E9: *.H1_12 P1.27 | length 116.5
  Top Layer w0.3: *.H1_12 27.045,83.655 27.045,80.233 28.924,78.353 v1(28.924,20.288)
  Bottom Layer w0.3: v1(28.924,20.288) 34.665,20.288 ; P1.27 56.856,12.236 44.85,12.236 ; 34.665,20.288 38.289,20.288 41.396,17.181 41.396,15.64 42.259,14.776 42.738,14.675 ; 34.665,20.288 36.544,18.409 36.544,15.361 37.23,14.675 42.738,14.675 ; 42.738,14.675 43.936,14.421 43.936,13.1 44.799,12.236 44.85,12.236 ; 42.738,14.675 43.707,14.675 44.164,14.218 44.164,12.922 44.85,12.236
E10: *.H1_20 P1.28 | length 78.1
  Top Layer w0.3: *.H1_20 37.23,83.63 37.23,81.147 41.904,76.473 41.904,70.275 43.986,68.193 43.986,57.042 55.67,45.358 55.67,18.29 P1.28
E11: *.H1_22 P1.29 | length 121.9
  Top Layer w0.3: *.H1_22 39.739,83.661 44.113,83.661 44.825,82.95 44.825,79.323 52.145,72.003 52.145,70.837 52.292,70.69 52.292,69.297 51.975,68.98 51.327,68.98 48.609,71.698 44.07,71.698 44.07,70.319 46.476,67.913 46.476,61.258 v1(45.663,60.446) ; v1(40.583,60.446) 40.583,30.194 51.556,19.221 51.556,13.1 52.419,12.236 59.396,12.236 P1.29
  Bottom Layer w0.3: 39.084,71.444 39.084,63.443 39.897,62.63 ; v1(40.583,60.446) v1(45.663,60.446)
E12: *.H1_24 P1.30 | length 118.2
  Top Layer w0.3: v1(42.31,80.41) 51.581,71.139 v1(51.581,69.767) ; P1.30 60.56,21.406 63.062,23.908 v1(63.062,62.808)
  Bottom Layer w0.3: *.H1_24 42.31,83.63 ; v1(42.31,80.41) 42.31,83.63 ; 43.783,79.724 42.319,81.188 42.319,83.621 42.31,83.63 ; 49.498,69.361 50.282,70.144 62.129,70.144 62.423,69.851 64.626,69.851 66.796,67.681 66.796,65.805 66.465,65.475 65.17,65.475 64.357,64.662 64.357,63.494 64.256,63.392 ; v1(51.581,69.767) 62.833,69.767 64.256,68.345 64.256,63.392 ; 62.757,62.706 63.57,62.706 63.671,62.808 ; v1(63.062,62.808) 63.671,62.808 ; 63.671,62.808 64.256,63.392 ; 63.671,62.808 63.9,62.808 64.256,63.163 64.256,63.392
E13: *.H1_26 P1.31 | length 117
  Top Layer w0.3: v1(61.843,17.113) 64.256,19.526 64.256,68.701 63.697,69.259 63.697,79.115 62.63,80.181 62.63,83.001 63.265,83.636 64.372,83.636 65.145,84.408 v1(65.145,88.716)
  Bottom Layer w0.3: *.H1_26 *.H1_26@44.15,85.49 ; v1(61.843,17.113) 61.843,14.657 P1.31 64.383,14.683 64.383,17.875 64.484,17.977 ; v1(65.145,88.716) 60.09,88.716 50.565,88.716 ; *.H1_26@44.15,85.49 44.836,86.176 49.132,86.176 49.93,86.974 49.93,88.081 50.565,88.716 ; *.H1_26@44.15,85.49 44.15,86.201 46.755,86.201 47.39,86.836 47.39,88.081 48.025,88.716 50.565,88.716
E14: *.H1_28 *.H1_39 P1.32 | length 126.6
  Top Layer w0.3: *.H1_39 61.35,79.861 v1(62.859,78.353) v1(62.859,70.707) ; P1.32 66.084,18.924 v1(66.084,58.363)
  Bottom Layer w0.3: *.H1_28 47.352,83.668 ; *.H1_39 60.052,83.668 47.352,83.668 ; v1(62.859,78.353) 56.077,78.353 53.435,80.994 50.809,80.994 49.948,81.856 49.948,82.983 49.295,83.636 47.384,83.636 47.352,83.668 ; v1(66.084,58.363) 68.37,58.363 71.876,61.868 ; 65.639,70.086 66.477,70.086 68.396,68.167 ; 65.639,70.086 63.48,70.086 v1(62.859,70.707) 65.018,70.707 65.639,70.086 ; 65.639,70.086 67.558,68.167 68.396,68.167 ; 68.396,68.167 69.336,67.227 ; 68.396,68.167 68.98,68.167 69.336,67.812 69.336,67.227 ; 69.336,66.491 69.336,66.389 70.25,65.475 70.352,65.475 ; 69.336,66.491 70.352,65.475 ; 69.336,66.491 69.336,67.227 ; 70.352,65.475 71.088,65.475 ; 71.088,65.475 71.52,65.475 71.876,65.119 71.876,64.687 ; 71.088,65.475 71.876,64.687 ; 71.876,61.868 71.876,64.687 ; 71.876,61.868 71.878,61.871 71.878,64.685 71.876,64.687
E15: *.H1_30 *.H1_45 P1.33 | length 129.7
  Top Layer w0.3: *.H1_30 47.39,83.65 47.39,79.318 v1(51.784,74.924) ; v1(67.253,74.924) 68.97,76.641 ; *.H1_45 68.97,80.121 68.97,76.641 ; v1(75.914,25.8) 75.914,50.59 72.104,54.4 72.104,66.745 71.876,68.193 68.97,71.098 68.97,76.641
  Bottom Layer w0.3: *.H1_30 49.892,86.152 67.042,86.152 67.704,85.49 67.704,83.636 *.H1_45 ; v1(51.784,74.924) v1(67.253,74.924) ; P1.33 67.024,14.784 67.024,16.91 v1(75.914,25.8)
"EPS RX": *.H2_36
"EPS TX": *.H2_38
GND: *.H2_29 *.H2_30 *.H2_32 | length 5.1
  Top Layer w0.3: *.H2_29 *.H2_30
  Bottom Layer w0.3: *.H2_30 *.H2_32
H0: *.H1_2 P2.7 | length 79.7
  Bottom Layer w0.3: *.H1_2 14.339,83.661 ; P2.7 31.82,63.4 ; 14.339,83.661 14.364,83.636 16.199,83.636 ; 14.339,83.661 16.173,83.661 16.199,83.636 ; 16.199,83.636 16.885,82.95 16.885,78.508 ; 16.885,78.508 16.885,73.146 17.266,72.765 17.266,66.135 18.739,64.662 18.739,59.036 19.132,58.642 28.569,58.642 31.82,61.893 31.82,63.4 ; 16.885,78.508 18.836,76.556 18.836,65.915 22.434,62.318 22.434,60.229 28.649,60.229 31.82,63.4
H1: *.H1_4 P2.8 | length 62.6
  Top Layer w0.3: *.H1_4 16.885,83.655 16.885,81.68 19.044,79.521 19.044,71.663 v1(19.552,71.155)
  Bottom Layer w0.3: v1(19.552,71.155) 19.552,66.745 22.988,63.309 22.988,60.783 28.295,60.783 30.548,63.036 ; 20.009,74.136 22.701,71.444 22.701,63.9 23.565,63.036 30.548,63.036 ; P2.8 31.236,65.356 ; 30.548,63.036 31.234,63.722 31.234,65.354 31.236,65.356 ; 30.548,63.036 30.88,63.036 31.236,63.392 31.236,65.356
OUT-1: *.H1_47
OUT-2: *.H1_48
OUT-3: *.H1_49
OUT-4: *.H1_50
OUT-5: *.H1_51
OUT-6: *.H1_52
P1_1: *.H2_1 P1.1 | length 120.3
  Top Layer w0.3: v1(18.79,86.201) 19.45,86.862 19.45,90.621 20.085,91.256 21.355,91.256 v1(21.99,90.621) ; v1(25.14,26.968) 25.14,60.746 26.156,61.762 26.156,80.08 24.53,81.705 24.53,85.407 25.299,86.176 v1(26.41,86.176)
  Bottom Layer w0.3: 15.081,80.574 14.37,81.285 14.37,82.847 13.604,83.612 12.465,83.612 11.83,84.247 11.83,86.19 *.H2_1 14.339,86.201 v1(18.79,86.201) ; 17.972,17.905 22.477,13.4 23.671,13.4 ; v1(21.99,90.621) 21.99,89.493 22.791,88.692 23.764,88.692 24.53,87.927 24.53,86.811 25.165,86.176 v1(26.41,86.176) ; P1.1 23.671,13.4 ; v1(25.14,26.968) 18.18,20.009 18.18,18.891 23.671,13.4
P1_2: *.H2_2 P1.2 | length 101.1
  Top Layer w0.3: *.H2_2 14.457,91.357 16.275,91.357 16.91,90.722 16.91,81.121 17.316,80.715 17.951,80.715 19.983,78.683 19.983,47.847 21.228,46.603 21.228,19.712 P1.2
  Bottom Layer w0.3: *.H2_2 14.345,88.735 14.345,86.836 15.005,86.176 18.739,86.176 19.425,85.49 19.425,79.572 21.355,77.641
P1_3: *.H2_3 P1.3 | length 123
  Top Layer w0.3: *.H2_3 14.37,86.19 14.37,81.248 18.434,77.184 v1(18.434,61.233) ; v1(21.482,54.35) 21.482,49.27 22.117,48.635 22.117,20.872 25.622,17.367 28.34,17.367 28.696,17.012 28.696,14.556 P1.3
  Bottom Layer w0.3: *.H2_3 16.896,88.716 18.815,88.716 19.45,88.081 19.45,76.879 18.815,76.244 18.18,76.244 17.494,75.559 17.494,74.136 21.203,70.428 21.203,61.309 22.422,60.09 26.994,60.09 ; v1(18.434,61.233) 19.425,60.242 19.425,56.407 v1(21.482,54.35)
P1_4: *.H2_4 P1.4 | length 87.1
  Top Layer w0.3: *.H2_4 14.345,88.705 14.345,81.426 14.04,81.121 14.04,76.168 17.748,72.46 17.748,65.957 17.621,65.83 17.621,16.402 19.45,14.573 26.173,14.573 P1.4
P1_5: P1.5
P1_6: *.H2_5 P1.6 | length 81.9
  Top Layer w0.3: *.H2_5 16.885,86.165 16.885,80.419 17.562,79.742 17.891,79.742 19.138,78.496 19.138,19.711 v1(19.348,19.501)
  Bottom Layer w0.3: v1(19.348,19.501) 26.519,19.501 P1.6
P1_49: *.H2_49 P1.49 | length 81.4
  Bottom Layer w0.3: *.H2_49 75.33,86.17 75.33,81.121 77.286,79.165 77.286,73.425 77.845,72.866 79.05,72.866 84.804,67.112 84.804,66.161 85.49,65.475 86.76,65.475 87.116,65.119 87.116,14.556 P1.49
P1_50: *.H2_50 P1.50 | length 101.2
  Top Layer w0.3: *.H2_50 74.932,89.99 75.305,89.617 75.305,86.979 76.075,86.208 77.406,86.208 77.845,85.769 77.845,80.842 78.505,80.181 81.807,80.181 84.118,77.87 84.118,72.079 84.804,71.393 84.804,16.275 85.139,15.94 P1.50
  Bottom Layer w0.3: 70.25,88.716 72.776,88.716 *.H2_50 ; 75.965,70.001 77.434,70.001 79.724,67.71 79.724,65.576 81.502,65.475 ; 82.034,19.866 P1.50
P2_1: *.H2_7 P2.1 | length 25.5
  Top Layer w0.3: *.H2_7 21.965,86.195 21.965,79.851 22.98,78.836 22.98,78.119 23.844,77.255 23.844,72.776 23.216,72.148 23.216,70.74 23.844,70.112 23.844,65.356 P2.1
P2_2: *.H2_8 P2.2 | length 49.9
  Top Layer w0.3: v1(24.505,79.343) 25.58,78.268 25.58,67.32 P2.2
  Bottom Layer w0.3: *.H2_8 21.99,88.71 ; v1(24.505,79.343) 24.505,79.826 ; P2.2 25,71.603 25.259,71.863 25.259,73.005 24.733,73.531 24.733,79.597 24.505,79.826 ; 21.99,88.71 22.008,88.692 22.008,84.396 22.742,83.661 23.715,83.661 24.505,82.872 24.505,79.826 ; 21.99,88.71 21.99,84.403 22.049,84.344 22.049,82.995 21.99,82.936 21.99,81.731 22.625,81.096 23.235,81.096 24.505,79.826
P2_3: *.H2_9 P2.3 | length 38.5
  Bottom Layer w0.3: *.H2_9 23.25,86.529 ; 25.063,81.121 24.505,81.68 24.505,84.322 ; 26.384,70.123 26.384,65.356 P2.3 28.696,65.356 28.696,70.885 27.032,72.549 27.032,82.885 26.255,83.661 25.165,83.661 24.505,84.322 ; 23.25,86.529 23.25,86.503 23.577,86.176 23.819,86.176 24.505,85.49 ; 23.25,86.529 23.577,86.201 24.124,86.201 24.505,85.82 24.505,85.49 ; 24.505,84.322 24.505,85.49
P2_4: *.H2_10 P2.4 | length 55.7
  Bottom Layer w0.3: P2.4 27.54,70.936 ; 25.825,72.909 25.825,80.054 24.505,81.375 24.505,88.735 *.H2_10 23.25,91.001 22.741,91.51 20.085,91.51 19.45,90.875 19.45,86.943 19.509,86.884 19.509,85.535 19.45,85.476 19.45,80.2 19.987,79.662 19.987,75.22 21.99,73.217 25.517,73.217 25.825,72.909 ; 25.825,72.909 25.825,72.65 27.54,70.936 ; 25.825,72.909 27.54,71.194 27.54,70.936
P2_5: *.H2_11 P2.5 | length 90.4
  Top Layer w0.3: v1(14.827,76.981) 15.488,76.981 v1(16.808,75.661) ; v1(26.181,59.48) 26.181,60.522 v1(27.883,62.224)
  Bottom Layer w0.3: v1(14.827,76.981) 14.345,77.464 14.345,82.872 13.604,83.612 12.465,83.612 11.83,84.247 11.83,90.9 13.1,92.17 23.717,92.17 24.505,91.383 24.505,88.735 *.H2_11 27.045,86.195 27.045,73.581 28.772,71.854 28.772,65.508 P2.5 28.104,62.224 v1(27.883,62.224) ; v1(16.808,75.661) 18.282,74.187 18.282,65.361 21.228,62.415 21.228,60.242 21.99,59.48 v1(26.181,59.48)
P2_6: *.H2_12 P2.6 | length 26.7
  Top Layer w0.3: *.H2_12 27.045,88.735 27.045,86.979 27.848,86.176 28.899,86.176 29.585,85.49 29.585,80.867 30.786,79.666 30.786,76.861 31.388,76.259 31.388,74.974 30.08,73.666 P2.6
P2_49: *.H2_51 P2.49 | length 35
  Top Layer w0.3: v1(72.79,88.716) 72.79,84.271 73.425,83.636 74.695,83.636 75.348,82.983 75.348,81.637 83.534,73.45 83.534,69.818 84.576,68.777 84.576,65.584 P2.49
  Bottom Layer w0.3: v1(72.79,88.716) 75.324,88.716 *.H2_51
P2_50: *.H2_52 P2.50 | length 46.3
  Bottom Layer w0.3: P2.50 79.271,73.429 ; 78.018,74.682 78.018,88.562 *.H2_52 75.33,88.73 75.33,77.37 78.018,74.682 ; 78.018,74.682 78.018,73.916 78.505,73.429 79.271,73.429 ; 78.018,74.682 79.271,73.429
V_BAT: *.H2_45 *.H2_46 | length 2.5
  Top Layer w0.3: *.H2_45 *.H2_46
pads on no net: *.H1_46 *.H2_6 *.H2_21 *.H2_22 *.H2_23 *.H2_24 *.H2_33 *.H2_34 *.H2_35 *.H2_37 *.H2_39 *.H2_40 *.H2_41 *.H2_42 *.H2_43 *.H2_44 *.H2_47 *.H2_48 P1.23 P1.25 P1.26 P1.48 P2.12 P2.21 P2.22 P2.27 P2.29 P2.30 P2.31 P2.32
copper on no net:
  other v2: 8,89.8 81.7,89.8
  other v3: 4.2,4.1 84.2,4.1

## Silkscreen, mask and mechanical layers (free items; w line width, h text height)
Mechanical 1:
  the board outline again, w0.254

## Dimensions
8,89.8 to 81.7,89.8 on Multi-Layer
4.2,4.1 to 8,89.8 on Multi-Layer
4.2,4.1 to 8,89.8 on Multi-Layer
4.2,4.1 to 84.2,4.1 on Multi-Layer
4.2,4.1 to 0,0 on Multi-Layer
0,0 to 5,93 on Multi-Layer
85.96,66.74 to 85.96,13.4 on Multi-Layer
85.96,13.4 to 81,7 on Multi-Layer
8,89.8 to 13.09,82.37 on Multi-Layer
8,89.8 to 13.09,82.37 on Multi-Layer

## Text inside footprints (layer, text, board x,y; h text height)
*: Top Layer "52" at 78.69,89.07 h1.52; Top Layer "51" at 78.69,86.57 h1.52; Top Layer "52" at 78.79,84.07 h1.52; Top Layer "51" at 78.79,81.57 h1.52; Top Layer "2" at 10.55,89.99 h1.52; Top Layer "1" at 10.55,87.45 h1.52; Top Layer "2" at 10.55,84.91 h1.52; Top Layer "1" at 10.55,82.37 h1.52; Top Layer "H2" at 6.09,87.37 h1.52; Top Layer "H1" at 6.09,83.37 h1.52; Mechanical 1 "J1" at 52.497,86.264 h0.76
P1: Top Overlay "50" at 87.992,15.432 h1.27; Top Overlay "49" at 87.992,12.892 h1.27; Top Overlay "1" at 22.46,12.892 h1.27; Top Overlay "2" at 22.46,15.432 h1.27
P2: Top Overlay "50" at 87.992,66.232 h1.27; Top Overlay "49" at 87.992,63.692 h1.27; Top Overlay "1" at 22.46,63.692 h1.27; Top Overlay "2" at 22.46,66.232 h1.27